# Altium PCB pcb.PcbDoc
Units mm, origin at the board's own origin, x right, y up, seen from the top; angles counter-clockwise.
Board outline 48 x 62 mm, 2 copper layers (Top Layer, Bottom Layer); 32 components, 31 nets, 134 pads, 3 vias.
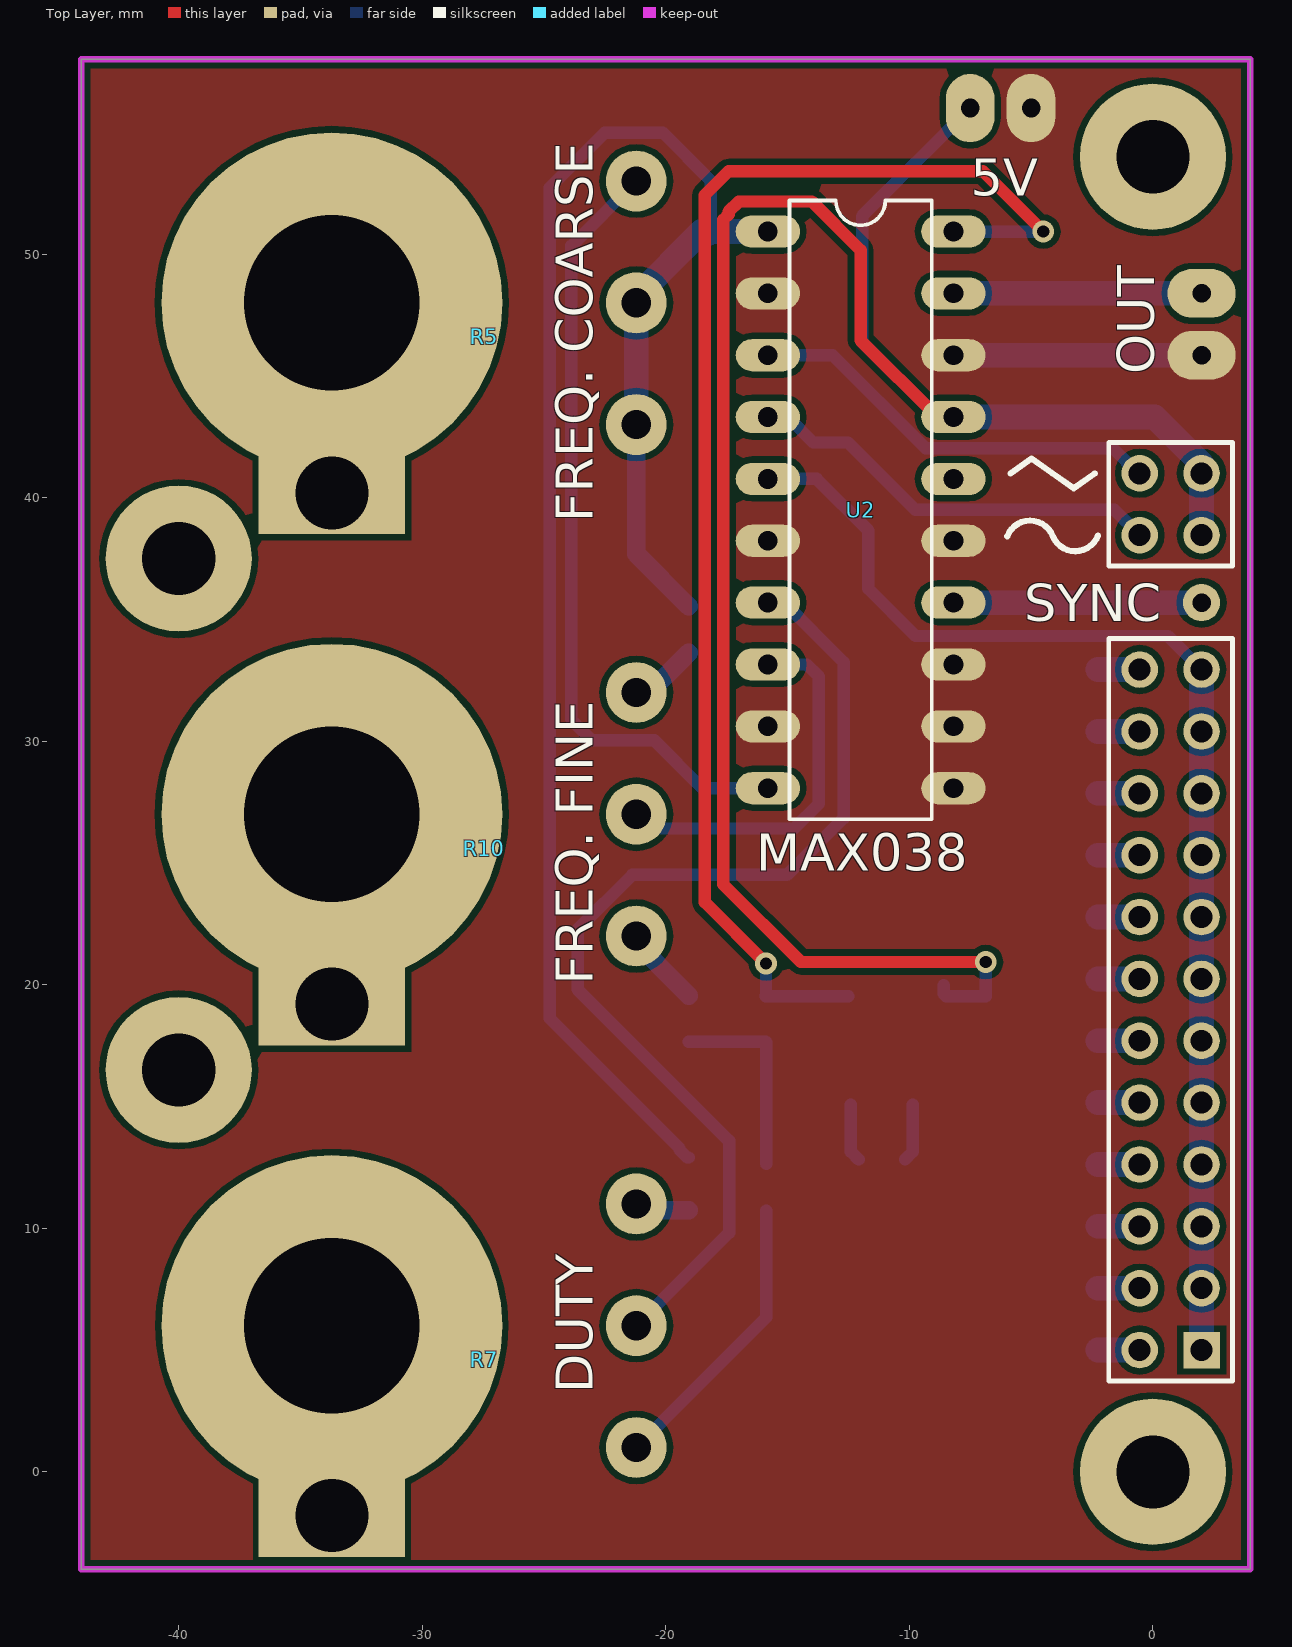
[diagram p0: Top Layer view]
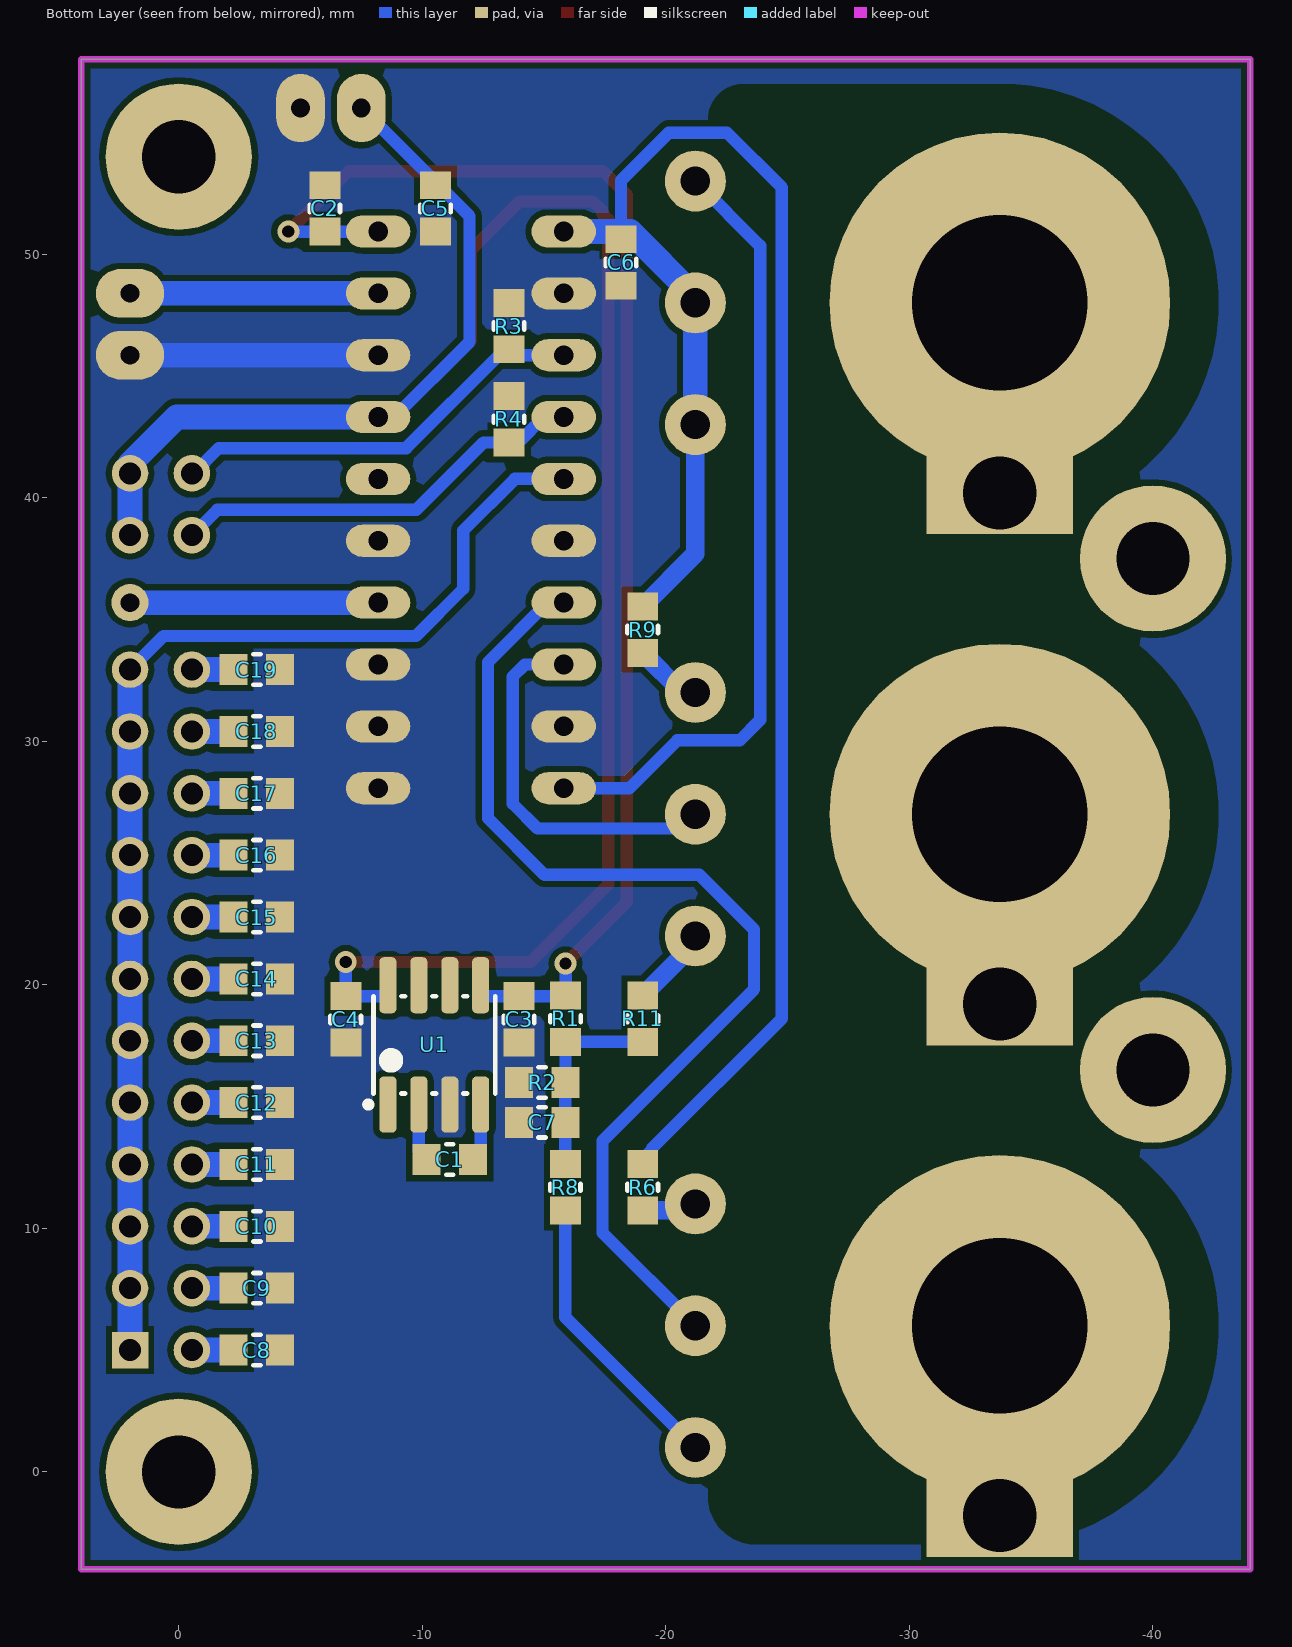
[diagram p1: Bottom Layer view, seen from below]
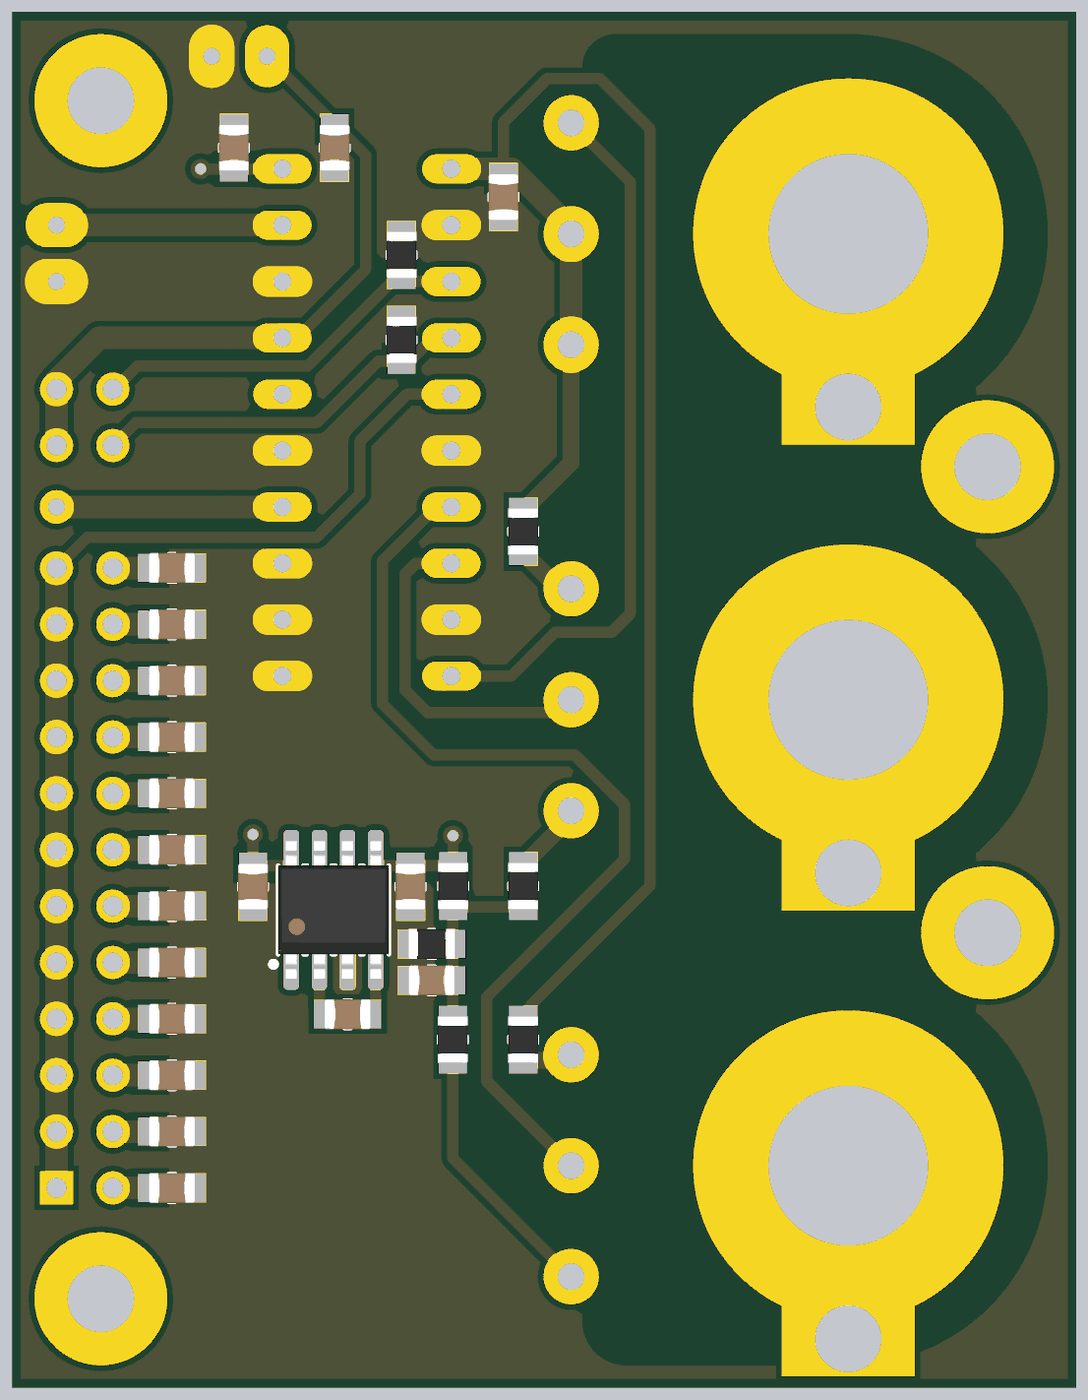
[diagram p2: 3D render of the assembled board from below, using the file's embedded part models]

## Layer stack, top to bottom
Top Solder: solder mask 0.0102, Solder Resist, Dk 3.5
Top Layer: signal copper 0.0356
Dielectric 1: dielectric 0.32, FR-4, Dk 4.8
Bottom Layer: signal copper 0.0356
Bottom Solder: solder mask 0.0102, Solder Resist, Dk 3.5

## Board outline
-44,-4 4,-4 4,58 -44,58

## Design rules (kind name [scope] priority, off if disabled: settings)
Clearance [All] p1: gap=0.254 ignorepadtopadclearanceinfootprint=FALSE
ComponentClearance [All] p1 off: gap=0.254 collisioncheckmode=3 verticalgap=0.254 showdistances=FALSE
HoleSize [All] p1: absolutevalues=TRUE maxlimit=8 minlimit=0.025 maxpercent=80.000 minpercent=20.000
MinimumSolderMaskSliver [All] p1 off: minsoldermaskwidth=0.254
PolygonConnect [All] p1: connectstyle=Direct reliefconductorwidth=0.254 reliefentries=4 polygonreliefangle="90 Angle" airgapwidth=0.254
RoutingVias [All] p1 off: holewidth=0.711 width=1.27 viastyle="Through Hole" minholewidth=0.711 minwidth=1.27 maxholewidth=0.711 maxwidth=1.27
SilkToSilkClearance [All] p1 off: silktosilkclearance=0.254
SilkToSolderMaskClearance [IsPad] p1 off: minsilkscreentomaskgap=0.254 clearancetoexposedcopper=TRUE
SolderMaskExpansion [All] p1: expansion=0.102
Width [All] p1: maxlimit=25.4 minlimit=0.254 preferedwidth=0.254
25 further rules are at their usual default settings.

## Classes and differential pairs
component class sch: C1 C2 C3 C4 C5 C6 C7 C8 C9 C10 C11 C12 C13 C14 C15 C16 C17 C18 C19 R1 R3 R4 R5 R6 R7 R8 R9 R10 R11 U1

## Components (designator, comment, footprint, x,y, rotation, side; value= is the part's Value field where it differs from the comment)
C1 "4700pF 100V" RC_0805_T1.1 -11.13,12.826 r0 bottom value="CAP CER 4700PF 50V X7R 0805"
C2 "4700pF 100V" RC_0805_T1.1 -6,51.877 r270 bottom value="CAP CER 4700PF 50V X7R 0805"
C3 "4700pF 100V" RC_0805_T1.1 -13.973,18.581 r90 bottom value="CAP CER 4700PF 50V X7R 0805"
C4 "4700pF 100V" RC_0805_T1.1 -6.86,18.581 r90 bottom value="CAP CER 4700PF 50V X7R 0805"
C5 "4700pF 100V" RC_0805_T1.1 -10.541,51.877 r90 bottom value="CAP CER 4700PF 50V X7R 0805"
C6 "4700pF 100V" RC_0805_T1.1 -18.161,49.657 r90 bottom value="CAP CER 4700PF 50V X7R 0805"
C7 "4700pF 100V" RC_0805_T1.1 -14.926,14.351 r180 bottom value="CAP CER 4700PF 50V X7R 0805"
C8 "Cap" RC_0805_T0.8 -3.207,5 r180 bottom value=100pF
C9 "Cap" RC_0805_T0.8 -3.207,7.54 r180 bottom value=100pF
C10 "Cap" RC_0805_T0.8 -3.207,10.08 r180 bottom value=100pF
C11 "Cap" RC_0805_T0.8 -3.207,12.62 r180 bottom value=100pF
C12 "Cap" RC_0805_T0.8 -3.207,15.16 r180 bottom value=100pF
C13 "Cap" RC_0805_T0.8 -3.207,17.7 r180 bottom value=100pF
C14 "Cap" RC_0805_T0.8 -3.207,20.24 r180 bottom value=100pF
C15 "Cap" RC_0805_T0.8 -3.207,22.78 r180 bottom value=100pF
C16 "Cap" RC_0805_T0.8 -3.207,25.32 r180 bottom value=100pF
C17 "Cap" RC_0805_T0.8 -3.207,27.86 r180 bottom value=100pF
C18 "Cap" RC_0805_T0.8 -3.207,30.4 r180 bottom value=100pF
C19 "Cap" RC_0805_T0.8 -3.207,32.94 r180 bottom value=100pF
R1 "" RR_0805 -15.889,18.604 r270 bottom value="RES SMD 60.4 OHM 0.1% 1/8W 0805"
R2 "" RR_0805 -14.926,15.988 r180 bottom value="RES SMD 60.4 OHM 0.1% 1/8W 0805"
R3 "" RR_0805 -13.56,47.048 r90 bottom value="RES SMD 60.4 OHM 0.1% 1/8W 0805"
R4 "" RR_0805 -13.56,43.22 r90 bottom value="RES SMD 60.4 OHM 0.1% 1/8W 0805"
R5 "RPot" R_POT_16K1 -33.714,48 r90 top value=1K
R6 "" RR_0805 -19.055,11.684 r90 bottom value="RES SMD 60.4 OHM 0.1% 1/8W 0805"
R7 "RPot" R_POT_16K1 -33.714,6 r90 top value=1K
R8 "" RR_0805 -15.875,11.684 r270 bottom value="RES SMD 60.4 OHM 0.1% 1/8W 0805"
R9 "" RR_0805 -19.055,34.581 r90 bottom value="RES SMD 60.4 OHM 0.1% 1/8W 0805"
R10 "RPot" R_POT_16K1 -33.714,27 r90 top value=1K
R11 "" RR_0805 -19.055,18.604 r90 bottom value="RES SMD 60.4 OHM 0.1% 1/8W 0805"
U1 "ICL7660" RR_SO-8 -10.495,17.529 r90 bottom
U2 "MAX038*" *DIL20 -12,39.5 r270 top

## Footprints (in the part's own frame and the unit in brackets; to place one, negate y for a bottom-side part, rotate by r counter-clockwise, add the part's x,y. Pads: shape width x height; smd on the part's side, far side on the other; paste and mask are expansions set on the pad)
*DIL20 [mil]
  oval 52x104 hole 32 mask+1: 1(-450,-150) 2(-350,-150) 3(-250,-150) 4(-150,-150) 5(-50,-150) 6(50,-150) 7(150,-150) 8(250,-150) 9(350,-150) 10(450,-150) 11(450,150) 12(350,150) 13(250,150) 14(150,150) 15(50,150) 16(-50,150) 17(-150,150) 18(-250,150) 19(-350,150) 20(-450,150)
  silkscreen extent -500,-115 500,115
R_POT_16K1 [mm]
  round 2.5 hole 1.2 mask+0.025: 1(-5,-12.5) 2(5,-12.5) 3(0,-12.5)
  rect 3.4x6 hole 3 unplated mask+0.025: 4(-7.8,0)
  round 14 hole 7.2 unplated mask+0.025: 4(0,0)
  Bottom Layer pour cut-out: 0,9 -3.444,8.315 -6.364,6.364 -8.315,3.444 -9,0 -9,0 -9,-10 -8.848,-10.765 -8.414,-11.414 -7.765,-11.848 -7,-12 -7,-12 7.5,-12 8.074,-11.886 8.561,-11.561 8.886,-11.074 9,-10.5 9,-10.5 9,0 8.315,3.444 6.364,6.364 3.444,8.315 0,9
  Multi-Layer pour cut-out: 0,6.5 -2.487,6.005 -4.596,4.596 -6.005,2.487 -6.5,0 -6.5,0 -6.005,-2.487 -4.596,-4.596 -2.487,-6.005 0,-6.5 0,-6.5 2.487,-6.005 4.596,-4.596 6.005,-2.487 6.5,0 6.5,0 6.005,2.487 4.596,4.596 2.487,6.005 0,6.5
RC_0805_T0.8 [mil] "Chip Capacitor"
  rect 45x50 smd mask+1: 1(-37.5,0) 2(37.5,0)
  silkscreen extent -6,-25 6,25, body extent -41,-27 41,27, height 22
RC_0805_T1.1 [mil] "Chip Capacitor"
  rect 45x50 smd mask+1: 1(-37.5,0) 2(37.5,0)
  silkscreen extent -6,-25 6,25, body extent -41,-27 41,27, height 45
RR_0805 [mil] "Chip Resistor; Body 1.6 x 0.8 mm (LxW typ)"
  rect 45x50 smd mask+1: 1(-37.5,0) 2(37.5,0)
  silkscreen extent -6,-25 6,25, body extent -41,-27 41,27, height 24
RR_SO-8 [mm] "SOIC, 8-Leads, Body 4.9x3.9mm, Pitch 1.27mm, IPC Low Density"
  rrect50% 2.3x0.7 smd mask+0.025: 1(-2.45,1.905) 2(-2.45,0.635) 3(-2.45,-0.635) 4(-2.45,-1.905) 5(2.45,-1.905) 6(2.45,-0.635) 7(2.45,0.635) 8(2.45,1.905)
  silkscreen extent -2.57,-2.5 2,2.84, body extent -3.1,-2.5 3.1,2.5, height 1.75

## Part data
C1 C2 C3 C4 C5 C6 C7: library part CAP-0805-472-100V, "CAPACITOR CHIP", Manufacturer="AVX Corporation", Package=0805, Cost=0,4, Order Number=08055C472KAZ2A
C8 C9 C10 C11 C12 C13 C14 C15 C16 C17 C18 C19: "Capacitor", LatestRevisionDate=17-Jul-2002, LatestRevisionNote="Re-released for DXP Platform.", PackageDescription="Radial Cap, Thru-Hole; 2 Leads; 0.3 in Pin Spacing", PackageReference=RAD-0.3, Published=8-Jun-2000, Publisher="Altium Limited"
R1 R2 R3 R4 R6 R8 R9 R11: library part RES-0805-60R4-0.1%, "RESISTOR", Manufacturer="CAP CER 4700PF 50V X7R 0805", Package=0805, Cost=0,36, Order Number=ERA-6AEB60R4V
R5 R7 R10: "Potentiometer", LatestRevisionDate=17-Jul-2002, LatestRevisionNote="Re-released for DXP Platform.", PackageDescription="Variable Resistor, Thru-Hole; 3 Leads", PackageReference=VR5, Published=8-Jun-2000, Publisher="Altium Limited", Set Position=0.5, Sim Note="Enter the Resistance value and the set point into parameter fields."
U2: "Integrated Circuit", Package="DIP-20 Maxim Integrated", Availability=Unavailable, MF="Maxim Integrated", MP=MAX038, Price=None, SnapEDA_Link=https://www.snapeda.com/parts/MAX038/Maxim%20Integrated/view-part/?ref=snap

## Free pads (board coordinates)
  round 1.5 hole 0.9 mask+0.025: 1(-0.54,41) 2(-0.54,5) 2(2,41) 3(-0.54,38.46) 3(2,7.54) 4(-0.54,7.54) 4(2,38.46) 5(2,10.08) 6(-0.54,10.08) 7(2,12.62) 8(-0.54,12.62) 9(2,15.16) 10(-0.54,15.16) 11(2,17.7) 12(-0.54,17.7) 13(2,20.24) 14(-0.54,20.24) 15(2,22.78) 16(-0.54,22.78) 17(2,25.32) 18(-0.54,25.32) 19(2,27.86) 20(-0.54,27.86) 21(2,30.4) 22(-0.54,30.4) 23(2,32.94) 24(-0.54,32.94)
  rect 1.5x1.5 hole 0.9 mask+0.025: 1(2,5)
  oval 2x2.8 hole 0.762 mask+0.025: 3(-7.5,56) 3(-5,56)
  round 1.524 hole 0.762 mask+0.025: 3(2,35.69)
  oval 2.8x2 hole 0.762 mask+0.025: 3(2,45.85) 3(2,48.39)
  round 6 hole 3 mask+0.025: 4(-40,16.5) 4(-40,37.5) 4(0,0) 4(0,54)

## Via types
v1: diameter 0.9, hole 0.5, Top Layer to Bottom Layer, tented both sides, 3 vias

## Nets (pads, with @x,y where several pads share a name; then routed paths per layer and width w, separated by ;. In a path a pad name is that pad's centre, name@x,y a point inside that pad or via, vN(x,y) a via of type N, cw(c..) or ccw(c..) an arc to the next point about the centre after c; other vN are vias at no path point)
+2V5_REF: C6.2 R5.1 R5.3 R6.2 R9.2 U2.1 | length 73
  Bottom Layer w0.508: -19.436,13.223 -19.119,12.905 R6.2@-19.055,12.905 ; -19.436,13.286 -24.765,18.615 -24.765,52.729 -22.503,54.991 -20.126,54.991 -18.161,53.026 -18.161,50.93 C6.2
  Bottom Layer w0.762: R5.1@-21.214,42.937 -21.214,37.692 R9.2
  Bottom Layer w1.016: R5.1@-21.214,42.937 R5.1 R5.3@-21.214,47.937 ; R5.3 -21.214,48.255 -18.539,50.93 -18.161,50.93 U2.1
+5V: C4.2 C5.2 pad.2@2,41 pad.3@-7.5,56 pad.4@2,38.46 U1.8 U2.17 | length 88.9
  Top Layer w0.508: U2.17 -8.85,43.31 -12,46.46 -12,50.16 -14,52.16 -17,52.16 -17.417,51.743 -17.417,51.635 -17.639,51.414 -17.639,24.119 -14.452,20.931 v1(-6.86,20.931)
  Bottom Layer w0.508: U1.8 -8.59,19.629 -8.494,19.533 C4.2 v1(-6.86,20.931) ; U2.17 -8.85,43.31 -11.938,46.398 -11.938,51.562 pad.3@-7.5,56
  Bottom Layer w1.016: U2.17 0.079,43.31 2,41.389 2,41 pad.4@2,38.46
-2V5_REF: C7.2 R1.2 R2.2 R8.1 R11.1 | length 8.1
  Bottom Layer w0.508: R11.1 R1.2 -15.882,17.644 R2.2@-15.882,16.139 ; R2.2@-15.885,15.995 -15.878,16.002 R2.2 C7.2 R8.1@-15.878,12.637
-5V: C2.2 C3.2 R1.1 U1.5 U2.20 | length 56.3
  Top Layer w0.508: v1(-15.882,20.873) -18.401,23.391 -18.401,52.421 -17.417,53.405 -6.98,53.405 v1(-4.5,50.924)
  Bottom Layer w0.508: R1.1@-15.889,19.533 C3.2 U1.5@-12.496,19.533 ; R1.1 -15.886,19.56 -15.886,20.869 v1(-15.882,20.873) ; U2.20 -8.184,50.924 C2.2 v1(-4.5,50.924)
GND: C2.1 C3.1 C4.1 C5.1 C6.1 C7.1 C8.2 C9.2 C10.2 C11.2 C12.2 C13.2 C14.2 C15.2 C16.2 C17.2 C18.2 C19.2 pad.3@2,45.85 pad.3@-5,56 R2.1 R3.2 R4.2 U1.3 U2.2 U2.6 U2.9 U2.11 U2.12 U2.13 U2.15 U2.18 | length 10.2
  Bottom Layer w1.016: U2.18 pad.3@2,45.85
NetC1_1: C1.1 U1.4 | length 2.4
  Bottom Layer w0.508: U1.4 -12.4,13.143 C1.1
NetC1_2: C1.2 U1.2 | length 2.4
  Bottom Layer w0.508: C1.2 -9.86,13.143 U1.2
NetC8_1: C8.1 pad.2@-0.54,5 | length 1.7
  Bottom Layer w1.016: C8.1 pad.2@-0.54,5
NetC9_1: C9.1 pad.4@-0.54,7.54 | length 1.7
  Bottom Layer w1.016: C9.1 pad.4@-0.54,7.54
NetC10_1: C10.1 pad.6 | length 1.7
  Bottom Layer w1.016: C10.1 pad.6
NetC11_1: C11.1 pad.8 | length 1.7
  Bottom Layer w1.016: C11.1 pad.8
NetC12_1: C12.1 pad.10 | length 1.7
  Bottom Layer w1.016: C12.1 pad.10
NetC13_1: C13.1 pad.12 | length 1.7
  Bottom Layer w1.016: C13.1 pad.12
NetC14_1: C14.1 pad.14 | length 1.7
  Bottom Layer w1.016: C14.1 pad.14
NetC15_1: C15.1 pad.16 | length 1.7
  Bottom Layer w1.016: C15.1 pad.16
NetC16_1: C16.1 pad.18 | length 1.7
  Bottom Layer w1.016: C16.1 pad.18
NetC17_1: C17.1 pad.20 | length 1.7
  Bottom Layer w1.016: C17.1 pad.20
NetC18_1: C18.1 pad.22 | length 1.7
  Bottom Layer w1.016: C18.1 pad.22
NetC19_1: C19.1 pad.24 | length 1.7
  Bottom Layer w1.016: C19.1 pad.24
NetP1_1: pad.1@-0.54,41 R3.1 U2.3 | length 17.3
  Bottom Layer w0.508: U2.3 -13.154,45.85 -9.337,42.033 -1.645,42.033 -0.612,41 pad.1@-0.54,41
NetP1_3: pad.3@-0.54,38.46 R4.1 U2.4 | length 17.3
  Bottom Layer w0.508: U2.4 -14.989,43.31 -13.947,42.268 R4.1 -12.518,42.268 -9.75,39.5 -1.58,39.5 pad.3@-0.54,38.46
NetP2_1: pad.1@2,5 pad.3@2,7.54 pad.5 pad.7 pad.9 pad.11 pad.13 pad.15 pad.17 pad.19 pad.21 pad.23 U2.5 | length 50.4
  Bottom Layer w0.508: U2.5 -13.804,40.77 -11.684,38.65 -11.684,36.262 -9.741,34.318 0.621,34.318 pad.23
  Bottom Layer w1.016: pad.1@2,5 2,7.54 pad.5 pad.7 pad.9 pad.11 pad.13 pad.15 pad.17 pad.19 pad.21 pad.23
NetR5_2: R5.2 U2.10 | length 32.5
  Bottom Layer w0.508: R5.2 -23.876,50.338 -23.876,30.877 -23.035,30.036 -20.471,30.036 -18.505,28.07 U2.10
NetR6_1: R6.1 R7.2 | length 2.2
  Bottom Layer w0.762: R7.2@-21.214,10.746 R6.1@-19.055,10.746
NetR7_1: R7.1 R8.2 | length 11.9
  Bottom Layer w0.508: R7.1 -15.875,6.339 R8.2
NetR7_3: R7.3 U2.7 | length 43.8
  Bottom Layer w0.508: R7.3 -17.399,9.815 -17.399,13.589 -23.622,19.812 -23.622,22.267 -21.376,24.513 -15.023,24.513 -12.7,26.836 -12.7,33.24 -15.15,35.69 U2.7
NetR9_1: R9.1 R10.2 | length 2.8
  Bottom Layer w0.762: R10.2 -20.683,32 R9.1
NetR10_1: R10.1 R11.2 | length 3.3
  Bottom Layer w0.762: R10.1 -21.214,21.715 R11.2
NetR10_3: R10.3 U2.8 | length 15.7
  Bottom Layer w0.508: R10.3 -20.63,26.416 -14.732,26.416 -13.716,27.432 -13.716,32.653 -14.213,33.15 U2.8
OUT: pad.3@2,48.39 U2.19 | length 10.2
  Bottom Layer w1.016: U2.19 pad.3@2,48.39
SYNC: pad.3@2,35.69 U2.14 | length 10.2
  Bottom Layer w1.016: U2.14 pad.3@2,35.69
pads on no net: R5.4 R7.4 R10.4 U1.1 U1.6 U1.7 U2.16

## Polygon pours and split planes (outlines as drawn)
GND on Bottom Layer "Bottom Layer-No Net" (solid, remove dead copper, pour order 2): -44,58 -44,-4 4,-4 4,58
GND on Top Layer "Top Layer-No Net" (solid, remove dead copper, pour order 4): -44,58 -44,-4 4,-4 4,58

## Keep-outs
Keep-Out Layer:
  the board outline again, w0.254

## Silkscreen, mask and mechanical layers (free items; w line width, h text height)
Top Overlay:
  lines w0.2: -1.81,3.73 3.27,3.73 3.27,34.21 -1.81,34.21 -1.81,3.73 ; -1.81,37.19 3.27,37.19 3.27,42.27 -1.81,42.27 -1.81,37.19
  lines w0.254: -5.977,38.416 cw(c-5.043,38.059) -4.115,38.43 ccw(c-3.186,38.802) -2.252,38.444 ; -5.842,40.996 -4.978,41.605 -4.115,40.996 -3.251,40.386 -2.388,40.996
  text "5V" at -7.468,52.4 h1.52
  text "OUT" at 0.051,45.06 h1.52 r90
  text "FREQ. COARSE" at -23,39 h1.52 r90
  text "SYNC" at -5.283,34.925 h1.52
  text "MAX038" at -16.281,24.689 h1.52
  text "FREQ. FINE" at -23,20 h1.52 r90
  text "DUTY" at -23,3.218 h1.52 r90